# Altium PCB PCB.PcbDoc
Units mm, origin at the board's own origin, x right, y up, seen from the top; angles counter-clockwise.
Board outline 26.05 x 29.7 mm, 2 copper layers (Top Layer, Bottom Layer); 32 components, 26 nets, 139 pads, 21 vias.
Unrouted connection lines stored in the file: 18.
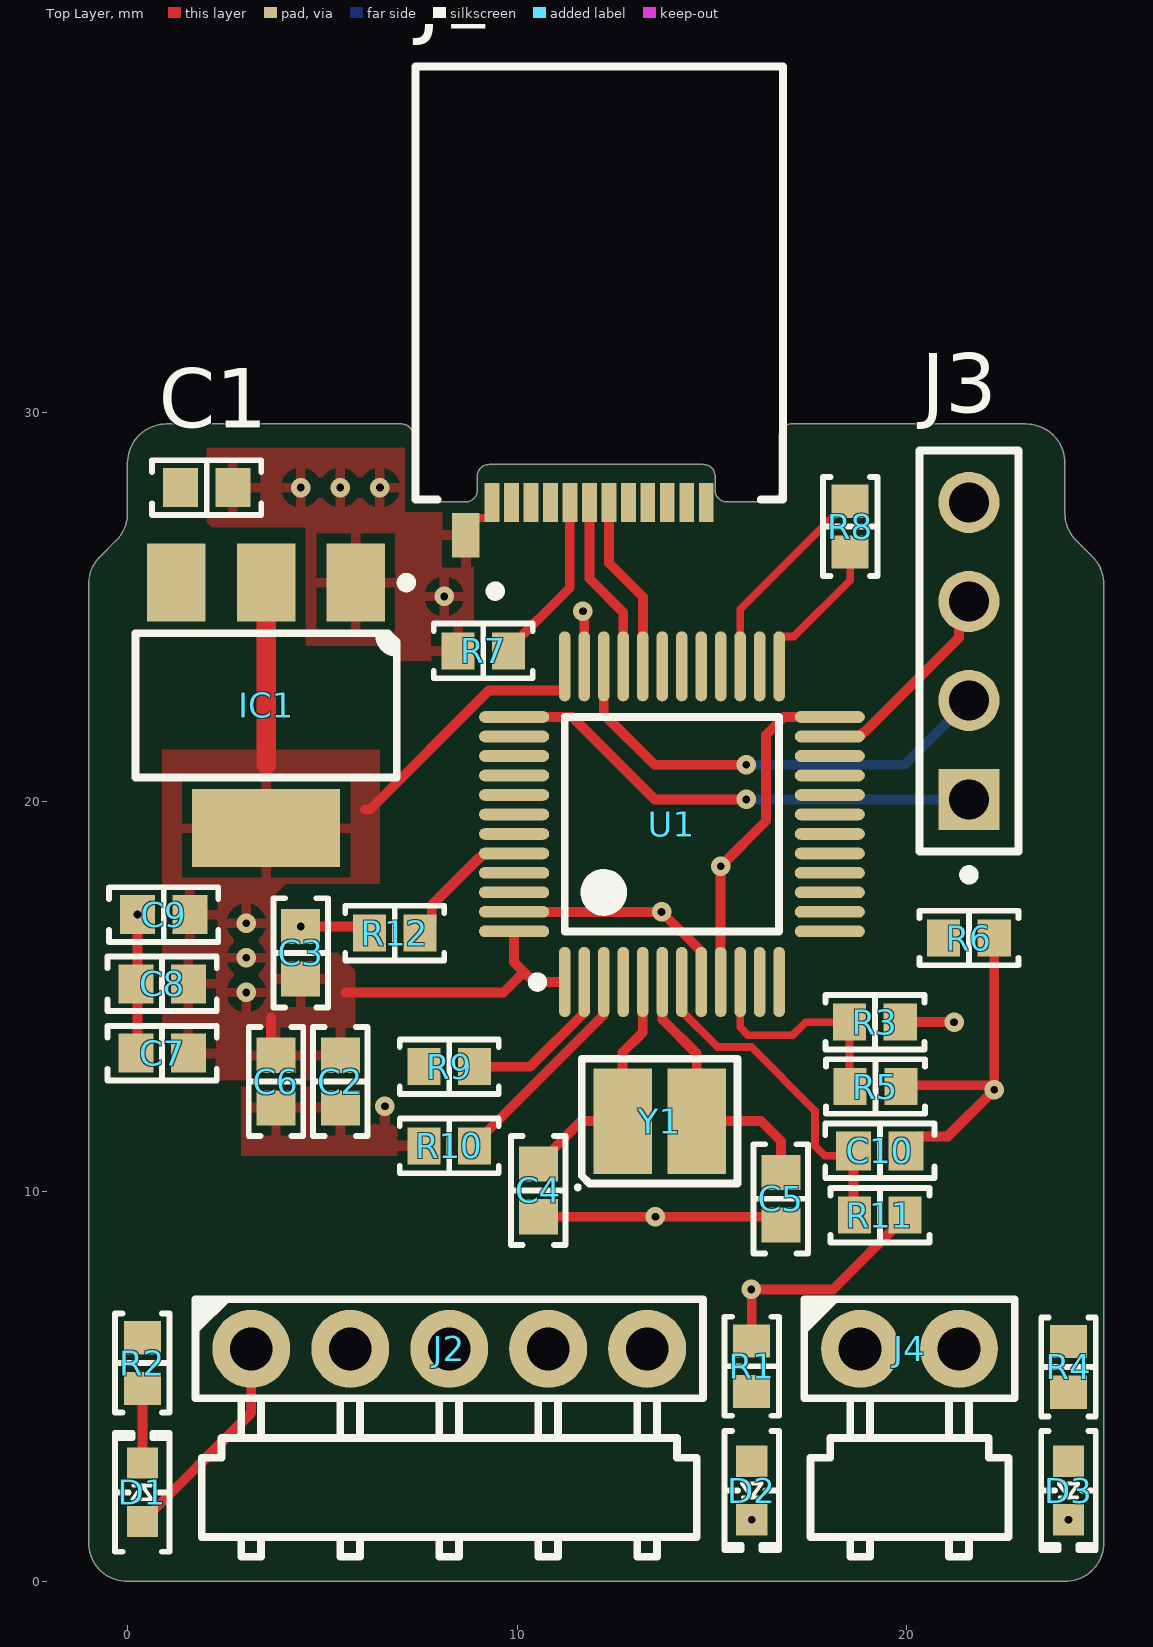
[diagram p0: Top Layer view]
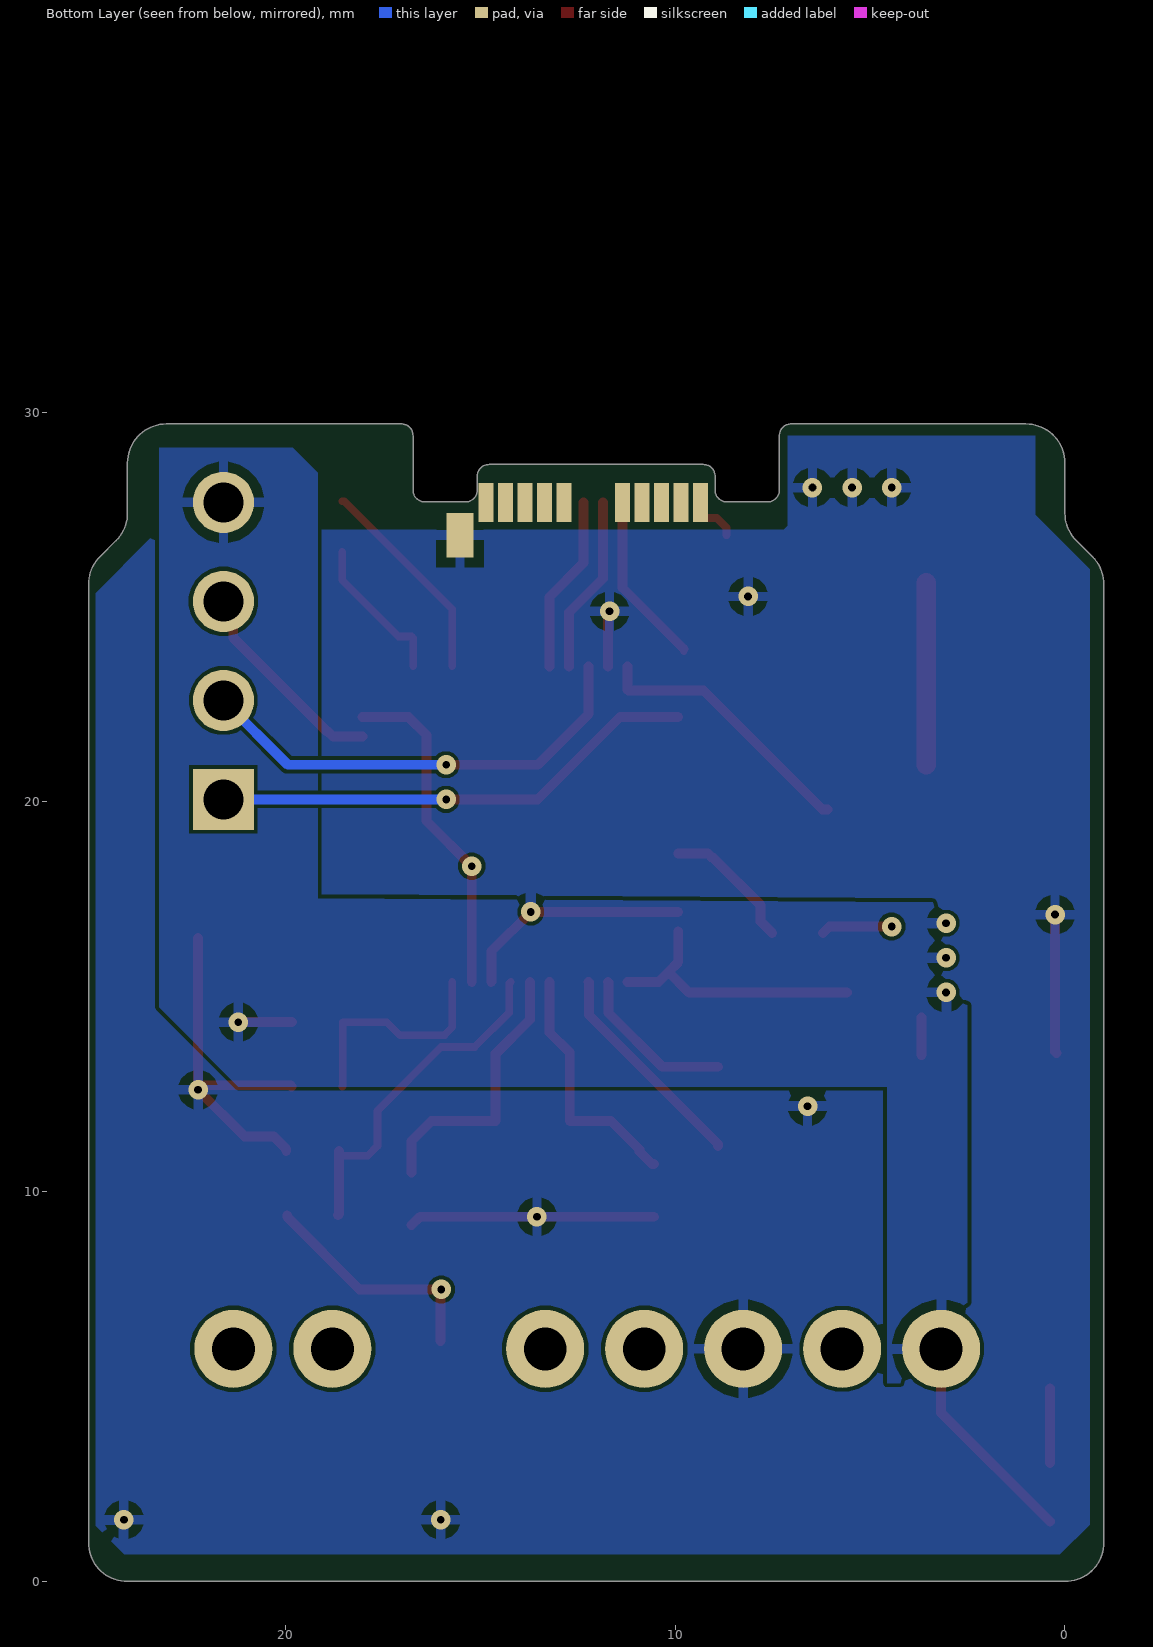
[diagram p1: Bottom Layer view, seen from below]

## Layer stack, top to bottom
Top Solder: solder mask 0.0102, Solder Resist, Dk 3.5
Top Layer: signal copper 0.0356
Dielectric 1: dielectric 0.32, FR-4, Dk 4.8
Bottom Layer: signal copper 0.0356
Bottom Solder: solder mask 0.0102, Solder Resist, Dk 3.5

## Board outline
-1,1 -1,25.586 cw(c0,25.586) -0.707,26.293 -0.293,26.707 ccw(c-1,27.414) 0,27.414 0,28.7 cw(c1,28.7) 1,29.7 7.026,29.7 cw(c7.026,29.4) 7.326,29.4 7.326,28 ccw(c7.626,28) 7.626,27.7 8.676,27.7 ccw(c8.676,28) 8.976,28 8.976,28.36 cw(c9.276,28.36) 9.276,28.66 14.776,28.66 cw(c14.776,28.36) 15.076,28.36 15.076,28 ccw(c15.376,28) 15.376,27.7 16.426,27.7 ccw(c16.426,28) 16.726,28 16.726,29.4 cw(c17.026,29.4) 17.026,29.7 23.052,29.7 cw(c23.052,28.7) 24.052,28.7 24.052,27.414 ccw(c25.052,27.414) 24.345,26.707 24.759,26.293 cw(c24.052,25.586) 25.052,25.586 25.052,1 cw(c24.052,1) 24.052,0 0,0 cw(c0,1)

## Design rules (kind name [scope] priority, off if disabled: settings)
Clearance [All] p1: gap=0.1 ignorepadtopadclearanceinfootprint=FALSE except(0: Arc-Hole Track-Hole SMDPad-Hole THPad-Hole Via-Hole Fill-Hole Poly-Hole Region-Hole Text-Hole)
DiffPairsRouting [All] p1: maxlimit=0.254 minlimit=0.254 mostfreqgap=0.254 toplayer_minwidth=0.381 toplayer_maxwidth=0.381 toplayer_prefwidth=0.381 bottomlayer_minwidth=0.381 bottomlayer_maxwidth=0.381 bottomlayer_prefwidth=0.381 maxuncoupledlength=12.7
PolygonConnect [All] p1: connectstyle=Relief reliefconductorwidth=0.254 reliefentries=4 polygonreliefangle="90 Angle" airgapwidth=0.254
RoutingVias [All] p1: holewidth=0.711 width=1.27 viastyle="Through Hole" minholewidth=0.711 minwidth=1.27 maxholewidth=0.711 maxwidth=1.27
SolderMaskExpansion [All] p1: expansion=0.102 istentingtop=FALSE
Width [All] p1: maxlimit=0.254 minlimit=0.16 preferedwidth=0.2 minimp=50.000000 maximp=50.000000 favimp=50.000000
29 further rules are at their usual default settings.

## Classes and differential pairs
differential pair USB: +USB_P -USB_N

## Components (designator, comment, footprint, x,y, rotation, side; value= is the part's Value field where it differs from the comment)
C1 "10 µF" "CAP 0603_1608" 2.032,28.067 r180 top
C2 "10 µF" "CAP 0603_1608" 5.461,12.827 r90 top
C3 "10 µF" "CAP 0603_1608" 4.445,16.129 r270 top
C4 "30 pF" "CAP 0603_1608" 10.541,10.033 r90 top
C5 "30 pF" "CAP 0603_1608" 16.764,9.819 r90 top
C6 "0.1 µF" "CAP 0603_1608" 3.81,12.827 r90 top
C7 "0.1 µF" "CAP 0603_1608" 0.889,13.556 r0 top
C8 "0.1 µF" "CAP 0603_1608" 0.889,15.334 r0 top
C9 "0.1 µF" "CAP 0603_1608" 0.929,17.112 r0 top
C10 "0.1 µF" "CAP 0603_1608" 19.304,11.049 r180 top
D1 "Green" "LED 0603_1608 GREEN" 0.381,2.286 r90 top
D2 "Blue" "LED 0603_1608 BLUE" 16.016,2.334 r270 top
D3 "Red" "LED 0603_1608 RED" 24.144,2.334 r270 top
IC1 "LD1117AS33TR" "ST SOT-223" 3.556,22.479 r270 top
J1 "105444-0001" FP-105444-0001-MFG 12.101,33.316 r0 top
J2 "M20-9960545" "HARWIN M20-9960545" 8.255,5.969 r0 top
J3 "HTSW-104-07-G-S" FP-HTSW-104-07-G-S-MFG 21.59,23.876 r90 top
J4 "M20-9960245" "HARWIN M20-9960245" 20.066,5.969 r0 top
R1 "100 Ohms" "RES 0603_1608" 16.016,5.521 r90 top
R2 "100 Ohms" "RES 0603_1608" 0.381,5.603 r270 top
R3 "4.7 kOhms" "RES 0603_1608" 19.177,14.351 r0 top
R4 "100 Ohms" "RES 0603_1608" 24.144,5.506 r90 top
R5 "4.7 kOhms" "RES 0603_1608" 19.192,12.7 r180 top
R6 "100 kOhms" "RES 0603_1608" 21.59,16.51 r180 top
R7 "5.1 kOhms" "RES 0603_1608" 9.129,23.876 r180 top
R8 "100 Ohms" "RES 0603_1608" 18.542,27.066 r90 top
R9 "10 kOhms" "RES 0603_1608" 8.255,13.208 r0 top
R10 "10 kOhms" "RES 0603_1608" 8.255,11.176 r0 top
R11 "100 kOhms" "RES 0603_1608" 19.304,9.398 r0 top
R12 "100 kOhms" "RES 0603_1608" 6.858,16.637 r0 top
U1 "STM32F102CBT6" STM-LQFP48_N 13.97,19.431 r90 top
Y1 "8 MHz" "NDK NX3225GD" 13.655,11.811 r0 top

## Footprints (in the part's own frame and the unit in brackets; to place one, negate y for a bottom-side part, rotate by r counter-clockwise, add the part's x,y. Pads: shape width x height; smd on the part's side, far side on the other; paste and mask are expansions set on the pad)
"CAP 0603_1608" [mm] "Chip Capacitor, 2-Leads, Body 1.60x0.80mm, IPC Medium Density"
  rect 0.9x1 smd: 1(-0.675,0) 2(0.675,0)
  silkscreen extent -1.4,-0.7 1.4,0.7, body extent -0.8,-0.41 0.8,0.41, height 0.82
FP-105444-0001-MFG [mm]
  rect 0.7x1.15 smd paste+0 mask+0: 1(-3.42,-6.47)
  rect 0.7x1.15 smd far side paste+0 mask+0: 2(3.42,-6.47)
  rect 0.38x1 smd paste+0 mask+0: A1(-2.75,-5.63) A2(-2.25,-5.63) A3(-1.75,-5.63) A4(-1.25,-5.63) A5(-0.75,-5.63) A6(-0.25,-5.63) A7(0.25,-5.63) A8(0.75,-5.63) A9(1.25,-5.63) A10(1.75,-5.63) A11(2.25,-5.63) A12(2.75,-5.63)
  rect 0.38x1 smd far side paste+0 mask+0: B1(2.75,-5.63) B2(2.25,-5.63) B3(1.75,-5.63) B4(1.25,-5.63) B5(0.75,-5.63) B8(-0.75,-5.63) B9(-1.25,-5.63) B10(-1.75,-5.63) B11(-2.25,-5.63) B12(-2.75,-5.63)
  silkscreen extent -4.71,-8.03 4.71,5.56, body extent -4.81,-7.14 4.81,5.66, height 0.25
FP-HTSW-104-07-G-S-MFG [mm]
  rect 1.57x1.57 hole 1.02 paste-2539.97 mask+0: 1(-3.81,0)
  round 1.57 hole 1.02 paste-2539.97 mask+0: 2(-1.27,0) 3(1.27,0) 4(3.81,0)
  silkscreen extent -5.87,-1.27 5.14,1.27, body extent -5.24,-1.37 5.24,1.37, height 0.25
"HARWIN M20-9960245" [mm] "2.54mm DIL PC TAIL PIN HEADER ASSEMBLY"
  round 2 hole 1.1: 1(-1.27,0) 2(1.27,0)
  silkscreen extent -2.7,-5.33 2.7,1.3, body extent -2.54,-10.9 2.54,0.32, height 2.54
"HARWIN M20-9960545" [mm] "2.54mm DIL PC TAIL PIN HEADER ASSEMBLY"
  round 2 hole 1.1: 1(-5.08,0) 2(-2.54,0) 3(0,0) 4(2.54,0) 5(5.08,0)
  silkscreen extent -6.51,-5.33 6.51,1.3, body extent -6.35,-10.9 6.35,0.32, height 2.54
"LED 0603_1608 BLUE" [mm] "Chip Diode, 2-Leads, Body 1.60x0.80mm, IPC Medium Density"
  rect 0.8x0.8 smd: 1(-0.75,0) 2(0.75,0)
  silkscreen extent -1.52,-0.7 1.52,0.7, body extent -0.8,-0.4 0.8,0.4, height 0.53
"LED 0603_1608 GREEN" [mm] "Chip Diode, 2-Leads, Body 1.60x0.80mm, IPC Medium Density"
  rect 0.8x0.8 smd: 1(-0.75,0) 2(0.75,0)
  silkscreen extent -1.52,-0.7 1.52,0.7, body extent -0.8,-0.4 0.8,0.4, height 0.53
"LED 0603_1608 RED" [mm] "Chip Diode, 2-Leads, Body 1.60x0.80mm, IPC Medium Density"
  rect 0.8x0.8 smd: 1(-0.75,0) 2(0.75,0)
  silkscreen extent -1.52,-0.7 1.52,0.7, body extent -0.8,-0.4 0.8,0.4, height 0.53
"NDK NX3225GD" [mm] "Crystal, 2-Leads, Body 2.50x3.20mm"
  rect 1.5x2.7 smd: 1(-0.95,0) 2(0.95,0)
  silkscreen extent -2.15,-1.75 2,1.6, body extent -1.6,-1.25 1.6,1.25, height 1
"RES 0603_1608" [mm] "Chip Resistor, 2-Leads, Body 1.60x0.80mm, IPC Medium Density"
  rect 0.85x0.95 smd: 1(-0.65,0) 2(0.65,0)
  silkscreen extent -1.27,-0.7 1.27,0.7, body extent -0.8,-0.4 0.8,0.4, height 0.45
"ST SOT-223" [mm] "SOT223, 4-Leads, Body 6.50x7.00mm (avg), Pitch 2.30mm, IPC Medium Density"
  rect 2x1.5 smd: 1(-3.15,2.3) 2(-3.15,0) 3(-3.15,-2.3)
  rect 2x3.8 smd: 4(3.15,0)
  silkscreen extent -3.27,-3.35 1.85,3.73, body extent -3.52,-3.25 3.5,3.25, height 1.8
STM-LQFP48_N [mm] "QFP, 48-Leads, Body 7x7mm, Pitch 0.5mm, IPC Medium Density"
  oval 1.8x0.3 smd: 1(-4.05,2.75) 2(-4.05,2.25) 3(-4.05,1.75) 4(-4.05,1.25) 5(-4.05,0.75) 6(-4.05,0.25) 7(-4.05,-0.25) 8(-4.05,-0.75) 9(-4.05,-1.25) 10(-4.05,-1.75) 11(-4.05,-2.25) 12(-4.05,-2.75) 25(4.05,-2.75) 26(4.05,-2.25) 27(4.05,-1.75) 28(4.05,-1.25) 29(4.05,-0.75) 30(4.05,-0.25) 31(4.05,0.25) 32(4.05,0.75) 33(4.05,1.25) 34(4.05,1.75) 35(4.05,2.25) 36(4.05,2.75)
  oval 0.3x1.8 smd: 13(-2.75,-4.05) 14(-2.25,-4.05) 15(-1.75,-4.05) 16(-1.25,-4.05) 17(-0.75,-4.05) 18(-0.25,-4.05) 19(0.25,-4.05) 20(0.75,-4.05) 21(1.25,-4.05) 22(1.75,-4.05) 23(2.25,-4.05) 24(2.75,-4.05) 37(2.75,4.05) 38(2.25,4.05) 39(1.75,4.05) 40(1.25,4.05) 41(0.75,4.05) 42(0.25,4.05) 43(-0.25,4.05) 44(-0.75,4.05) 45(-1.25,4.05) 46(-1.75,4.05) 47(-2.25,4.05) 48(-2.75,4.05)
  silkscreen extent -4.17,-2.75 2.75,3.57, body extent -3.5,-3.5 3.5,3.5, height 1.6

## Part data
C1 C2 C3: library part GMC10X5R106M10NT, "CAP0603 X5R 10UF 20% 10V", Device Package="0603 (1608 Metric)", Manufacturer="Cal-Chip Electronics, Inc.", Operating Temperature="-55°C ~ 85°C", Supplier Part Number 1=4713-GMC10X5R106M10NTCT-ND, Temperature Coefficient=X5R, Tolerance=±20%, Voltage - Rated=10V, Applications="General Purpose", Capacitance="10 µF", ComponentLink1Description=Datasheet, ComponentLink1URL=https://88ce57.p3cdn1.secureserver.net/wp-content/uploads/2023/01/gmc_series-2.pdf, ComponentLink2Description="DigiKey Link", ComponentLink2URL=https://www.digikey.com/en/products/detail/cal-chip-electronics-inc/GMC10X5R106M10NT/18151101, lastupdated="2/9/2024 8:08:49 PM", Lifecycle Status=Active, Minimum Order=1, Mounting Type="Surface Mount, MLCC", Package / Case="0603 (1608 Metric)", Packaging=TapeAndReel, Part Number=GMC10X5R106M10NT, partid=55951, price=0.01, series=GMC, Size / Dimension="0.063\" L x 0.031\" W (1.60mm x 0.80mm)", Supplier 1=DigiKey, Thickness (Max)="0.039\" (1.00mm)"
C4 C5: library part 0603N300J500CT, "CAP CER 30PF 50V C0G/NP0 0603", Device Package="0603 (1608 Metric)", Manufacturer="Walsin Technology Corporation", Operating Temperature="-55°C ~ 125°C", Supplier Part Number 1=1292-1515-1-ND, Temperature Coefficient="C0G, NP0", Tolerance=±5%, Voltage - Rated=50V, Applications="General Purpose", Capacitance="30 pF", ComponentLink1Description=Datasheet, ComponentLink1URL=http://www.passivecomponent.com/wp-content/uploads/2018/10/MLCC.pdf, ComponentLink2Description="DigiKey Link", ComponentLink2URL=https://www.digikey.com/en/products/detail/walsin-technology-corporation/0603N300J500CT/9355012, lastupdated="2/9/2024 8:10:20 PM", Lifecycle Status=Active, Minimum Order=1, Mounting Type="Surface Mount, MLCC", Package / Case="0603 (1608 Metric)", Packaging=TapeAndReel, Part Number=0603N300J500CT, Part Status=Active, partid=9974, price=0.01, series=-, Size / Dimension="0.063\" L x 0.031\" W (1.60mm x 0.80mm)", Supplier 1=DigiKey, Thickness (Max)="0.034\" (0.87mm)"
C6 C7 C8 C9 C10: library part GMC10X7R104K25NT, "CAP0603 X7R .1UF 10% 25V", Device Package="0603 (1608 Metric)", Manufacturer="Cal-Chip Electronics, Inc.", Operating Temperature="-55°C ~ 125°C", Supplier Part Number 1=4713-GMC10X7R104K25NTCT-ND, Temperature Coefficient=X7R, Tolerance=±10%, Voltage - Rated=25V, Applications="General Purpose", Capacitance="0.1 µF", ComponentLink1Description=Datasheet, ComponentLink1URL=https://88ce57.p3cdn1.secureserver.net/wp-content/uploads/2023/01/gmc_series-2.pdf, ComponentLink2Description="DigiKey Link", ComponentLink2URL=https://www.digikey.com/en/products/detail/cal-chip-electronics-inc/GMC10X7R104K25NT/19910724, lastupdated="2/9/2024 8:08:39 PM", Lifecycle Status=Active, Minimum Order=1, Mounting Type="Surface Mount, MLCC", Package / Case="0603 (1608 Metric)", Packaging=TapeAndReel, Part Number=GMC10X7R104K25NT, partid=56631, price=0.01, series=GMC, Size / Dimension="0.063\" L x 0.031\" W (1.60mm x 0.80mm)", Supplier 1=DigiKey, Thickness (Max)="0.035\" (0.90mm)"
D1: library part 19-213/GVC-AMNB/3T, "LED GREEN CLEAR 2SMD", Current - Test=20mA, Device Package="0603 (1608 Metric)", Lens Color=Colorless, Manufacturer="Everlight Electronics Co Ltd", Supplier Device Package=2-SMD, Supplier Part Number 1=1080-1576-1-ND, Voltage - Forward (Vf) (Typ)=2.05V, Color=Green, ComponentLink1Description=Datasheet, ComponentLink1URL=//media.digikey.com/pdf/Data%20Sheets/Everlight%20PDFs/19-213-GVC-AMNB-3T.pdf, ComponentLink2Description="DigiKey Link", ComponentLink2URL=https://www.digikey.com/en/products/detail/everlight-electronics-co-ltd/19-213-GVC-AMNB-3T/8535270, Configuration=Standard, Height (Max)=0.70mm, lastupdated="6/3/2024 7:58:53 PM", Lens Size="1.20mm x 0.80mm", Lens Style="Rectangle with Flat Top", Lens Transparency=Clear, Lifecycle Status=Active, Minimum Order=1, Mounting Type="Surface Mount", Package / Case="0603 (1608 Metric)", Packaging=TapeAndReel, Part Number=19-213/GVC-AMNB/3T, Part Status=Active, partid=611, price=0.06, series=-, Size / Dimension="1.60mm L x 0.80mm W", Supplier 1=DigiKey, Viewing Angle=120°, Wavelength - Peak=568nm
D2: library part 19-217/B7C-ZL2N1B3X/3T, "LED BLUE CLEAR 2SMD", Current - Test=2mA, Device Package="0603 (1608 Metric)", Lens Color=Colorless, Manufacturer="Everlight Electronics Co Ltd", Supplier Device Package=2-SMD, Supplier Part Number 1=1080-1584-1-ND, Voltage - Forward (Vf) (Typ)=2.7V, Color=Blue, ComponentLink1Description=Datasheet, ComponentLink1URL=//media.digikey.com/pdf/Data%20Sheets/Everlight%20PDFs/19-217-B7C-ZL2N1B3X-3T.pdf, ComponentLink2Description="DigiKey Link", ComponentLink2URL=https://www.digikey.com/en/products/detail/everlight-electronics-co-ltd/19-217-B7C-ZL2N1B3X-3T/8535278, Configuration=Standard, Height (Max)=0.50mm, lastupdated="6/3/2024 7:57:52 PM", Lens Size="1.00mm x 0.80mm", Lens Style="Rectangle with Flat Top", Lens Transparency=Clear, Lifecycle Status=Active, Minimum Order=1, Mounting Type="Surface Mount", Package / Case="0603 (1608 Metric)", Packaging=TapeAndReel, Part Number=19-217/B7C-ZL2N1B3X/3T, Part Status=Active, partid=797, price=0.08, series=-, Size / Dimension="1.60mm L x 0.80mm W", Supplier 1=DigiKey, Viewing Angle=120°, Wavelength - Dominant=470nm, Wavelength - Peak=468nm
D3: library part 19-213SDRC/S259/TR8, "LED RED CLEAR 2SMD", Current - Test=10mA, Device Package="0603 (1608 Metric)", Lens Color=Colorless, Manufacturer="Everlight Electronics Co Ltd", Supplier Device Package=2-SMD, Supplier Part Number 1=1080-1580-1-ND, Voltage - Forward (Vf) (Typ)=2V, Color=Red, ComponentLink1Description=Datasheet, ComponentLink1URL=//media.digikey.com/pdf/Data%20Sheets/Everlight%20PDFs/19-213SDRC-S259-TR8.pdf, ComponentLink2Description="DigiKey Link", ComponentLink2URL=http://digikey.com/product-detail/en/everlight-electronics-co-ltd/19-213SDRC-S259-TR8/1080-1580-1-ND/8535303, Configuration=Standard, Height (Max)=0.70mm, lastupdated="6/3/2024 7:59:48 PM", Lens Size="1.20mm x 0.80mm", Lens Style="Rectangle with Flat Top", Lens Transparency=Clear, Lifecycle Status=Active, Minimum Order=1, Mounting Type="Surface Mount", Package / Case="0603 (1608 Metric)", Packaging=TapeAndReel, Part Number=19-213SDRC/S259/TR8, Part Status=Active, partid=372, price=0.06, series=-, Size / Dimension="1.60mm L x 0.80mm W", Supplier 1=DigiKey, Viewing Angle=120°, Wavelength - Peak=650nm
IC1: "IC REG LINEAR 3.3V 1A SOT223", Current - Output=1A, Current - Quiescent (Iq)="10 mA", Manufacturer=STMicroelectronics, Operating Temperature="0°C ~ 125°C", Package / Case="TO-261-4, TO-261AA", Supplier Device Package=SOT-223, Supplier Part Number 1=497-1228-1-ND, Voltage - Input (Max)=15V, Voltage - Output (Min/Fixed)=3.3V, Voltage Dropout (Max)="1.3V @ 1A", ComponentLink1Description=Datasheet, ComponentLink1URL=http://www.st.com/content/ccc/resource/technical/document/datasheet/a5/c3/3f/c9/2b/15/40/49/CD00002116.pdf/files/CD00002116.pdf/jcr:content/translations/en.CD00002116.pdf, ComponentLink2Description="DigiKey Link", ComponentLink2URL=https://www.digikey.com/en/products/detail/stmicroelectronics/LD1117AS33TR/585752, lastupdated="6/3/2024 8:14:21 PM", Lifecycle Status=Active, Minimum Order=1, Mounting Type="Surface Mount", Number of Regulators=1, Output Configuration=Positive, Output Type=Fixed, Packaging=TapeAndReel, Part Number=LD1117AS33TR, Part Status=Active, price=0.32, Protection Features="Over Current, Over Temperature", PSRR="75dB (120Hz)", series=-, Supplier 1=DigiKey
J1: library part CMP-04767-000023-1, "CONN PLUG USB3.1 TYPEC BRD EDGE", Current Rating=5A, Flammability Rating="UL94 V-0", Insulation Color=Black, Max Operating Temperature=85°C, Min Operating Temperature=-30°C, Connector Type=USB, Contact Material="Copper Alloy", Contact Plating=Gold, Features=Shielded, Gender=Male, Housing Material=Thermoplastic, Length=9.18mm, Mating Cycles=10000, Mount="Straddle Mount", Number of Contacts=24, Number of Pins=22, Number of Ports=1, Number of Terminals/Pins=22, Orientation="Right Angle", Packaging=Tray, Pitch=0.5mm, RoHS Compliant=Yes, series=105444, Shielding=Shielded, Termination=Solder, USB Standard="USB 3.1"
J2: "CONN HEADER R/A 5POS 2.54MM", Current Rating (Amps)="3A per Contact", Insulation Color=Black, Manufacturer="Harwin Inc.", Material Flammability Rating="UL94 V-0", Operating Temperature="-40°C ~ 105°C", Supplier Part Number 1=952-2246-ND, ComponentLink1Description=Datasheet, ComponentLink1URL=https://cdn.harwin.com/pdfs/Harwin_PC_Connectors_M20.pdf, ComponentLink2Description="DigiKey Link", ComponentLink2URL=https://www.digikey.com/en/products/detail/harwin-inc/M20-9960545/3728210, Connector Type="Header, Cuttable", Contact Finish - Mating=Gold, Contact Length - Mating="0.240\" (6.10mm)", Contact Length - Post="0.118\" (3.00mm)", Contact Material=Brass, Contact Shape=Square, Contact Type="Male Pin", Fastening Type=Push-Pull, Insulation Height="0.100\" (2.54mm)", Insulation Material="Polyamide (PA6T), Nylon 6T", lastupdated="9/21/2022 7:23:36 PM", Lifecycle Status=Active, Minimum Order=1, Mounting Type="Through Hole, Right Angle", Number of Positions=5, Number of Positions Loaded=All, Number of Rows=1, Packaging=Bulk, Part Number=M20-9960545, Part Status=Active, partid=168, Pitch - Mating="0.100\" (2.54mm)", price=0.14, Row Spacing - Mating="-40°C ~ 105°C", series=M20, Shrouding=Unshrouded, Style="Board to Board or Cable", Supplier 1=DigiKey, Termination=Solder
J3: library part CMP-02766-001776-1, "CONN HEADER VERT 4POS 2.54MM", Contact Material=Bronze, Contact Plating=Gold, Gender=Male, Mount="Through Hole", Number of Contacts=4, Number of Rows=1, Packaging=Bulk, Pitch=2.54mm, Radiation Hardening=No, Reach SVHC Compliant=Yes, RoHS Compliant=Yes, series=HTSW, Termination="Through Hole"
J4: "CONN HEADER R/A 2POS 2.54MM", Current Rating (Amps)="3A per Contact", Insulation Color=Black, Manufacturer="Harwin Inc.", Material Flammability Rating="UL94 V-0", Operating Temperature="-40°C ~ 105°C", Supplier Part Number 1=952-2244-ND, ComponentLink1Description=Datasheet, ComponentLink1URL=https://cdn.harwin.com/pdfs/Harwin_PC_Connectors_M20.pdf, ComponentLink2Description="DigiKey Link", ComponentLink2URL=https://www.digikey.com/en/products/detail/harwin-inc/M20-9960245/3728208, Connector Type="Header, Cuttable", Contact Finish - Mating=Gold, Contact Length - Mating="0.240\" (6.10mm)", Contact Length - Post="0.118\" (3.00mm)", Contact Material=Brass, Contact Shape=Square, Contact Type="Male Pin", Fastening Type=Push-Pull, Insulation Height="0.100\" (2.54mm)", Insulation Material="Polyamide (PA6T), Nylon 6T", lastupdated="9/21/2022 7:22:55 PM", Lifecycle Status=Active, Minimum Order=1, Mounting Type="Through Hole, Right Angle", Number of Positions=2, Number of Positions Loaded=All, Number of Rows=1, Packaging=Bulk, Part Number=M20-9960245, Part Status=Active, partid=165, Pitch - Mating="0.100\" (2.54mm)", price=0.07, Row Spacing - Mating="-40°C ~ 105°C", series=M20, Shrouding=Unshrouded, Style="Board to Board or Cable", Supplier 1=DigiKey, Termination=Solder
R1 R2 R4 R8: library part RCA0603100RJNEA, "RCA0603 100R 5% 200 ET1 E3", Device Package="0603 (1608 Metric)", Manufacturer="Vishay Dale", Operating Temperature="-55°C ~ 155°C", Power (Watts)="0.1W, 1/10W", Ratings=AEC-Q200, Supplier Device Package=0603, Supplier Part Number 1=541-RCA0603100RJNEACT-ND, Temperature Coefficient=±200ppm/°C, Tolerance=±5%, ComponentLink1Description=Datasheet, ComponentLink1URL=https://www.vishay.com/docs/20037/rcae3.pdf, ComponentLink2Description="DigiKey Link", ComponentLink2URL=https://www.digikey.com/en/products/detail/vishay-dale/RCA0603100RJNEA/19522959, Composition="Thick Film", Features="Anti-Sulfur, Automotive AEC-Q200", Height - Seated (Max)="0.020\" (0.50mm)", lastupdated="2/9/2024 8:40:41 PM", Lifecycle Status=Active, Minimum Order=1, Number of Terminations=2, Package / Case="0603 (1608 Metric)", Packaging=TapeAndReel, Part Number=RCA0603100RJNEA, Part Status=Active, partid=78145, price=0.01, Resistance="100 Ohms", series=RCA, Size / Dimension="0.061\" L x 0.033\" W (1.55mm x 0.85mm)", Supplier 1=DigiKey
R3 R5: library part ERA-3VRW4701V, "RES 4.7K OHM 0.05% 1/8W 0603", Device Package="0603 (1608 Metric)", Manufacturer="Panasonic Electronic Components", Operating Temperature="-55°C ~ 155°C", Power (Watts)="0.125W, 1/8W", Ratings=AEC-Q200, Supplier Device Package=0603, Supplier Part Number 1=10-ERA-3VRW4701VCT-ND, Temperature Coefficient=±10ppm/°C, Tolerance=±0.05%, ComponentLink1Description=Datasheet, ComponentLink1URL=https://api.pim.na.industrial.panasonic.com/file_stream/main/fileversion/9152, ComponentLink2Description="DigiKey Link", ComponentLink2URL=https://www.digikey.com/en/products/detail/panasonic-electronic-components/ERA-3VRW4701V/12086954, Composition="Thin Film", Features="Anti-Sulfur, Automotive AEC-Q200", Height - Seated (Max)="0.022\" (0.55mm)", lastupdated="2/9/2024 8:41:01 PM", Lifecycle Status=Active, Minimum Order=1, Number of Terminations=2, Package / Case="0603 (1608 Metric)", Packaging=TapeAndReel, Part Number=ERA-3VRW4701V, Part Status=Active, partid=71885, price=0.19, Resistance="4.7 kOhms", series=ERA-3V, Size / Dimension="0.063\" L x 0.031\" W (1.60mm x 0.80mm)", Supplier 1=DigiKey
R6 R11 R12: library part MCT0603MG1003BP500, "MCT 0603-05 0.1% AT P5 100K", Device Package="0603 (1608 Metric)", Manufacturer="Vishay Beyschlag/Draloric/BC Components", Operating Temperature="-55°C ~ 175°C", Power (Watts)=0.21W, Ratings=AEC-Q200, Supplier Device Package=0603, Supplier Part Number 1=749-MCT0603MG1003BP500CT-ND, Temperature Coefficient=±5ppm/°C, Tolerance=±0.1%, ComponentLink1Description=Datasheet, ComponentLink1URL=https://www.vishay.com/docs/28952/mcs0402at-mcs0603at-mcu0805at-mca1206at.pdf, ComponentLink2Description="DigiKey Link", ComponentLink2URL=https://www.digikey.com/en/products/detail/vishay-beyschlag-draloric-bc-components/MCT0603MG1003BP500/19251865, Composition="Thin Film", Features="Anti-Sulfur, Automotive AEC-Q200, Moisture Resistant", Height - Seated (Max)="0.022\" (0.55mm)", lastupdated="2/9/2024 8:40:40 PM", Lifecycle Status=Active, Minimum Order=1, Number of Terminations=2, Package / Case="0603 (1608 Metric)", Packaging=TapeAndReel, Part Number=MCT0603MG1003BP500, Part Status=Active, partid=78329, price=0.72, Resistance="100 kOhms", series="MCT AT - Precision", Size / Dimension="0.061\" L x 0.033\" W (1.55mm x 0.85mm)", Supplier 1=DigiKey
R7: library part TNPW06035K10BYEN, "RES 5.1K OHM 0.1% 1/10W 0603", Device Package="0603 (1608 Metric)", Manufacturer="Vishay Dale", Operating Temperature="-55°C ~ 155°C", Power (Watts)="0.125W, 1/8W", Ratings=AEC-Q200, Supplier Device Package=0603, Supplier Part Number 1=541-9831-1-ND, Temperature Coefficient=±10ppm/°C, Tolerance=±0.1%, ComponentLink1Description=Datasheet, ComponentLink1URL=http://www.vishay.com/docs/28758/tnpw_e3.pdf, ComponentLink2Description="DigiKey Link", ComponentLink2URL=http://digikey.com/product-detail/en/vishay-dale/TNPW06035K10BYEN/541-9831-1-ND/9562456, Composition="Thin Film", Features="Anti-Sulfur, Automotive AEC-Q200, Moisture Resistant", Height - Seated (Max)="0.022\" (0.55mm)", lastupdated="2/9/2024 8:43:35 PM", Lifecycle Status=Active, Minimum Order=1, Number of Terminations=2, Package / Case="0603 (1608 Metric)", Packaging=TapeAndReel, Part Number=TNPW06035K10BYEN, Part Status=Active, partid=5273, price=0.27, Resistance="5.1 kOhms", series="TNPW e3", Size / Dimension="0.061\" L x 0.033\" W (1.55mm x 0.85mm)", Supplier 1=DigiKey
R9 R10: library part MCT0603MG1002BP500, "MCT 0603-05 0.1% AT P5 10K", Device Package="0603 (1608 Metric)", Manufacturer="Vishay Beyschlag/Draloric/BC Components", Operating Temperature="-55°C ~ 175°C", Power (Watts)=0.21W, Ratings=AEC-Q200, Supplier Device Package=0603, Supplier Part Number 1=749-MCT0603MG1002BP500CT-ND, Temperature Coefficient=±5ppm/°C, Tolerance=±0.1%, ComponentLink1Description=Datasheet, ComponentLink1URL=https://www.vishay.com/docs/28952/mcs0402at-mcs0603at-mcu0805at-mca1206at.pdf, ComponentLink2Description="DigiKey Link", ComponentLink2URL=https://www.digikey.com/en/products/detail/vishay-beyschlag-draloric-bc-components/MCT0603MG1002BP500/19251868, Composition="Thin Film", Features="Anti-Sulfur, Automotive AEC-Q200, Moisture Resistant", Height - Seated (Max)="0.022\" (0.55mm)", lastupdated="2/9/2024 8:40:40 PM", Lifecycle Status=Active, Minimum Order=1, Number of Terminations=2, Package / Case="0603 (1608 Metric)", Packaging=TapeAndReel, Part Number=MCT0603MG1002BP500, Part Status=Active, partid=78314, price=0.72, Resistance="10 kOhms", series="MCT AT - Precision", Size / Dimension="0.061\" L x 0.033\" W (1.55mm x 0.85mm)", Supplier 1=DigiKey
U1: library part CMP-0237-00241-3, "ARM Cortex-M3 32-bit MCU, 128 KB Flash, 16 KB Internal RAM, 37 I/Os, 48-pin LQFP, -40 to 85 degC, Tray", I/Os (High Current)=37, Operating Frequency(F) (Processor speed) (MHz)=48, Supply Voltage(Vcc) min (V)=2, A/D Converter="1x12-bit (10 Channel)", ComponentLink1Description="Manufacturer URL", ComponentLink1URL=http://www.st.com/web/en/home.html, ComponentLink2Description=Datasheet, ComponentLink2URL=http://www.st.com/st-web-ui/static/active/en/resource/technical/document/datasheet/CD00210831.pdf, ComponentLink3Description="Package Specification", ComponentLink3URL=http://www.st.com/st-web-ui/static/active/en/resource/technical/document/datasheet/DM00058181.pdf, Core="ARM Cortex-M3", DatasheetVersion="Rev. 5", FLASH Size (Prog) (kB)=128, Internal RAM Size (kB)=16, Mounting Technology="Surface Mount", PackageDescription="48-Pin Low Profile Quad Flat Package, 7 x 7 mm Body, 0.5 mm Pitch", PackageReference=LQFP48, PackageVersion="Rev. 6, 06/2013", Packing=Tray, PartNumber=STM32F102CBT6
Y1: library part NX3225GD-8MHZ-EXS00A-CG04874, "CRYSTAL 8.0000MHZ 8PF SMD", ESR (Equivalent Series Resistance)="500 Ohms", Frequency Stability=±50ppm, Frequency Tolerance=±20ppm, Load Capacitance=8pF, Manufacturer="NDK America, Inc.", Operating Mode=Fundamental, Operating Temperature="-40°C ~ 150°C", Package / Case="2-SMD, No Lead", Ratings=AEC-Q200, Supplier Part Number 1=644-1391-1-ND, ComponentLink2Description="DigiKey Link", ComponentLink2URL=https://www.digikey.com/en/products/detail/ndk-america-inc/NX3225GD-8MHZ-EXS00A-CG04874/9172047, Frequency="8 MHz", Height - Seated (Max)="0.039\" (1.00mm)", lastupdated="6/3/2024 8:17:11 PM", Lifecycle Status=Active, Minimum Order=1, Mounting Type="Surface Mount", Packaging=TapeAndReel, Part Number=NX3225GD-8MHZ-EXS00A-CG04874, Part Status=Active, partid=746, price=0.37, series=NX3225GD, Size / Dimension="0.126\" L x 0.098\" W (3.20mm x 2.50mm)", Supplier 1=DigiKey, Type="MHz Crystal"

## Via types
v1: diameter 0.5, hole 0.2, Top Layer to Bottom Layer, 21 vias

## Nets (pads, with @x,y where several pads share a name; then routed paths per layer and width w, separated by ;. In a path a pad name is that pad's centre, name@x,y a point inside that pad or via, vN(x,y) a via of type N, cw(c..) or ccw(c..) an arc to the next point about the centre after c; other vN are vias at no path point)
3v3: C2.2 C3.2 C6.2 C7.2 C8.2 C9.2 D1.1 IC1.2 IC1.4 J2.1 J3.4 R1.2 R3.2 R11.2 U1.1 U1.9 U1.24 U1.36 U1.48 | length 41.5
  Top Layer w0.254: D1.1 3.175,4.33 J2.1 ; C6.2@3.683,13.502 3.683,14.474 ; 5.588,15.113 9.652,15.113 10.174,15.635 ; 6.096,19.812 6.223,19.812 9.269,22.858 11.199,22.858 11.22,22.879 U1.36 ; U1.48 9.92,15.889 10.174,15.635 ; U1.1 10.428,15.381 10.174,15.635 ; U1.9 v1(15.22,18.353) 16.383,19.516 16.383,21.717 16.847,22.181 U1.24 ; R1.2 16.016,7.479 v1(16.002,7.493) 18.099,7.493 19.954,9.348 R11.2 ; R3.2 v1(21.209,14.351)
  Top Layer w0.5: 3.556,20.955 IC1.2
  other v1: 3.048,15.113 3.048,16.002 3.048,16.891
BOOT0: R12.2 U1.44 | length 3.5
  Top Layer w0.254: R12.2 7.806,16.935 7.806,17.35 9.014,18.558 9.035,18.558 9.158,18.681 U1.44
BOOT1: R6.2 U1.20
GND: C1.1 C2.1 C3.1 C4.1 C5.1 C6.1 C7.1 C8.1 C9.1 C10.1 D2.2 D3.2 IC1.1 J1.1 J1.2 J1.A1 J2.3 J3.3 R5.1 R6.1 R7.2 R9.1 R10.1 R12.1 U1.8 U1.23 U1.35 U1.47 | length 35
  Top Layer w0.2: J1.1 8.681,27.036 8.931,27.286 9.261,27.286 9.351,27.376 J1.A1
  Top Layer w0.254: C7.1 0.254,13.596 v1(0.254,17.112) ; v1(4.445,16.804) 6.041,16.804 R12.1 ; U1.47 v1(13.703,17.181) 14.711,16.173 14.711,15.39 U1.8 ; C4.1 16.55,9.358 C5.1 ; v1(11.684,24.892) 11.72,24.856 U1.35 ; U1.23 18.782,21.681 18.905,21.804 18.926,21.804 21.338,24.216 21.338,24.894 J3.3 ; R5.1 19.873,12.731 v1@22.123,12.731 ; C10.1 19.979,11.099 20.302,11.422 21.048,11.422 v1(22.24,12.614) R6.1
  other v1: 16.016,1.584 24.144,1.584 13.545,9.358 6.604,12.192 8.128,25.273 4.445,28.067 5.461,28.067 6.477,28.067
LINK_LED: R2.1 R4.2 U1.30
NetD1_2: D1.2 R2.2 | length 1.9
  Top Layer w0.254: D1.2 R2.2
NetD2_1: D2.1 R1.1
NetD3_1: D3.1 R4.1
NetJ1_A5: J1.A5 R7.1 | length 4.5
  Top Layer w0.2: R7.1 R7.1@9.779,23.926
  Top Layer w0.245: R7.1@9.779,23.926 11.351,25.498 J1.A5
NetR9_2: R9.2 U1.2 | length 4.2
  Top Layer w0.254: R9.2 10.33,13.208 11.711,14.589 11.711,15.372 U1.2
NetR10_2: R10.2 U1.3 | length 5.6
  Top Layer w0.254: R10.2 8.905,11.226 12.211,14.532 12.211,15.372 U1.3
OSCIN: C4.2 U1.5 Y1.1 | length 6.4
  Top Layer w0.254: C4.2 10.591,10.708 10.914,11.031 10.914,11.081 11.644,11.811 Y1.1 12.705,13.569 13.22,14.084 U1.5
OSCOT: C5.2 U1.6 Y1.2 | length 7.1
  Top Layer w0.254: U1.6 13.729,15.372 13.729,14.418 14.605,13.542 Y1.2 16.256,11.811 16.764,11.303 C5.2
RST: C10.2 R11.1 U1.7 | length 8.8
  Top Layer w0.2: U1.7 14.255,15.346 14.255,14.601 15.14,13.716 16.002,13.716 17.638,12.08 17.638,11.176 17.892,10.922 C10.2@18.542,10.922
  Top Layer w0.254: C10.2 18.629,9.423 R11.1
SWCLK: J3.1 U1.37 | length 12.5
  Top Layer w0.254: U1.37 11.413,22.181 13.528,20.066 v1(15.875,20.066)
  Bottom Layer w0.254: v1(15.875,20.066) J3.1
SWDIO: J3.2 U1.34 | length 11.8
  Top Layer w0.254: U1.34 12.22,22.253 13.518,20.955 v1(15.875,20.955)
  Bottom Layer w0.254: v1(15.875,20.955) 19.939,20.955 J3.2
TRG_RST: J2.2 U1.18
TRG_SWCLK: J2.5 U1.15
TRG_SWDIO: J2.4 R8.1 U1.25 | length 3.9
  Top Layer w0.2: U1.25 16.72,24.204 16.766,24.25 17.101,24.25 18.542,25.691 R8.1
TRG_SWDO: R8.2 U1.27 | length 5.4
  Top Layer w0.2: U1.27 15.72,24.944 18.492,27.716 R8.2
UART1_RX: J4.1 U1.13
UART1_TX: J4.2 U1.12
USB_N: J1.A7 U1.32 | length 4.6
  Top Layer w0.254: 12.351,26.13 J1.A7 ; 12.359,26.13 13.228,25.261 U1.32@13.228,23.481
USB_P: J1.A6 U1.33 | length 4.6
  Top Layer w0.254: J1.A6 11.851,25.732 12.72,24.863 U1.33
USB_VBUS: C1.2 IC1.3 J1.A4 J1.A9
WKUP: R3.1 R5.2 U1.10 | length 5.8
  Top Layer w0.2: U1.10 15.72,14.218 15.922,14.016 17.064,14.016 17.399,14.351 R3.1 18.527,12.715 R5.2
pads on no net: J1.A2 J1.A3 J1.A8 J1.A10 J1.A11 J1.A12 J1.B1 J1.B2 J1.B3 J1.B4 J1.B5 J1.B8 J1.B9 J1.B10 J1.B11 J1.B12 U1.4 U1.11 U1.14 U1.16 U1.17 U1.19 U1.21 U1.22 U1.26 U1.28 U1.29 U1.31 U1.38 U1.39 U1.40 U1.41 U1.42 U1.43 U1.45 U1.46

## Polygon pours and split planes (outlines as drawn)
GND on Top Layer "GND_L01_P005" (solid, pour order 5): 2.921,12.7 6.052,12.7 6.941,13.589 7.78,13.589 7.78,11.176 7.526,10.922 2.921,10.922
GND on Top Layer "GND_L01_P003" (solid, pour order 3): 2.032,29.083 2.032,27.178 2.159,27.051 4.572,27.051 4.572,24.003 6.604,24.003 6.985,23.622 8.89,23.622 8.89,25.781 8.89,27.432 7.112,27.432 7.112,29.083
3v3 on Top Layer "3V3_L01_P000" (solid, pour order 0): 0.889,21.336 0.889,17.547 0.889,12.856 5.813,12.856 5.842,12.827 5.842,15.683 5.396,16.129 3.695,16.129 3.695,17.538 4.064,17.907 6.477,17.907 6.477,21.336
GND on Bottom Layer "GND_L02_P007" (solid, pour order 7): 0.762,29.4 7.112,29.4 7.112,27.09 7.215,26.987 23.241,26.987 24.867,25.362 24.867,1.435 24.13,0.699 0.127,0.699 -0.635,1.46 -0.635,25.971 0.762,27.368
3v3 on Bottom Layer "3V3_L02_P006" (solid, pour order 6): 2.516,17.42 2.5,17.404 2.5,5.089 4.563,5.089 4.564,5.088 4.564,12.7 21.209,12.7 23.241,14.732 23.241,29.083 19.812,29.083 19.177,28.448 19.177,17.526

## Silkscreen, mask and mechanical layers (free items; w line width, h text height)
Mechanical 1:
  circle w0.013: c23.326,10.2 r1.1
  circle w0.013: c0.726,10.2 r1.1
  lines w0.013: -1,9.004 ccw(c0.726,10.2) -1,11.396 ; -1,9.004 ccw(c0.726,10.2) -1,11.396 ; -1,9.004 -1,1 -1,25.586 ; -1,11.396 -1,25.586 ; -1,25.586 cw(c0,25.586) -0.707,26.293 ; -1,25.586 cw(c0,25.586) -0.707,26.293 ; -0.707,26.293 -0.293,26.707 ; -0.707,26.293 -0.293,26.707 ; -0.293,26.707 ccw(c-1,27.414) 0,27.414 ; -0.293,26.707 ccw(c-1,27.414) 0,27.414 ; 0,27.414 0,28.7 ; 0,27.414 0,28.7 ; 0,28.7 cw(c1,28.7) 1,29.7 ; 0,28.7 cw(c1,28.7) 1,29.7 ; 1,29.7 7.026,29.7 ; 1,29.7 7.026,29.7 ; 7.026,29.7 cw(c7.026,29.4) 7.326,29.4 ; 7.026,29.7 cw(c7.026,29.4) 7.326,29.4 ; 7.326,28 ccw(c7.626,28) 7.626,27.7 ; 7.326,28 ccw(c7.626,28) 7.626,27.7 ; 7.326,28 7.326,29.4 ; 7.326,28 7.326,29.4 ; 7.626,27.7 8.676,27.7 ; 7.626,27.7 8.676,27.7 ; 8.676,27.7 ccw(c8.676,28) 8.976,28 ; 8.676,27.7 ccw(c8.676,28) 8.976,28 ; 8.976,28 8.976,28.36 ; 8.976,28 8.976,28.36 ; 8.976,28.36 cw(c9.276,28.36) 9.276,28.66 ; 8.976,28.36 cw(c9.276,28.36) 9.276,28.66 ; 9.276,28.66 14.776,28.66 ; 9.276,28.66 14.776,28.66 ; 14.776,28.66 cw(c14.776,28.36) 15.076,28.36 ; 14.776,28.66 cw(c14.776,28.36) 15.076,28.36 ; 15.076,28 ccw(c15.376,28) 15.376,27.7 ; 15.076,28 ccw(c15.376,28) 15.376,27.7 ; 15.076,28 15.076,28.36 ; 15.076,28 15.076,28.36 ; 15.376,27.7 16.426,27.7 ; 15.376,27.7 16.426,27.7 ; 16.426,27.7 ccw(c16.426,28) 16.726,28 ; 16.426,27.7 ccw(c16.426,28) 16.726,28 ; 16.726,28 16.726,29.4 ; 16.726,28 16.726,29.4 ; 16.726,29.4 cw(c17.026,29.4) 17.026,29.7 ; 16.726,29.4 cw(c17.026,29.4) 17.026,29.7 ; 17.026,29.7 23.052,29.7 ; 17.026,29.7 23.052,29.7 ; 23.052,29.7 cw(c23.052,28.7) 24.052,28.7 ; 23.052,29.7 cw(c23.052,28.7) 24.052,28.7 ; 24.052,0 ccw(c24.052,1) 25.052,1 ; 24.052,0 ccw(c24.052,1) 25.052,1 ; 24.052,0 0,0 24.052,0 ; 24.052,27.414 ccw(c25.052,27.414) 24.345,26.707 ; 24.052,27.414 ccw(c25.052,27.414) 24.345,26.707 ; 24.052,27.414 24.052,28.7 ; 24.052,27.414 24.052,28.7 ; 24.345,26.707 24.759,26.293 ; 24.345,26.707 24.759,26.293 ; 24.759,26.293 cw(c24.052,25.586) 25.052,25.586 ; 24.759,26.293 cw(c24.052,25.586) 25.052,25.586 ; 25.052,1 25.052,25.586 ; 25.052,1 25.052,9.004 ; 25.052,9.004 cw(c23.326,10.2) 25.052,11.396 ; 25.052,9.004 cw(c23.326,10.2) 25.052,11.396 ; 25.052,11.396 25.052,25.586 ; 14.762,0.679 ccw(c15.762,0.679) 15.762,-0.321 cw(c15.762,0.679) 14.762,0.679